# Altium PCB ESC.PcbDoc_Small.PcbDoc (part 2 of 2)
Units mil, origin at the board's own origin, x right, y up, seen from the top; angles counter-clockwise.
Board outline 6500 x 4500 mil, 2 copper layers (Top Layer, Bottom Layer), stack 33.512 mil thick; 85 components, 105 nets, 407 pads, 133 vias.
Unrouted connection lines stored in the file: 8.
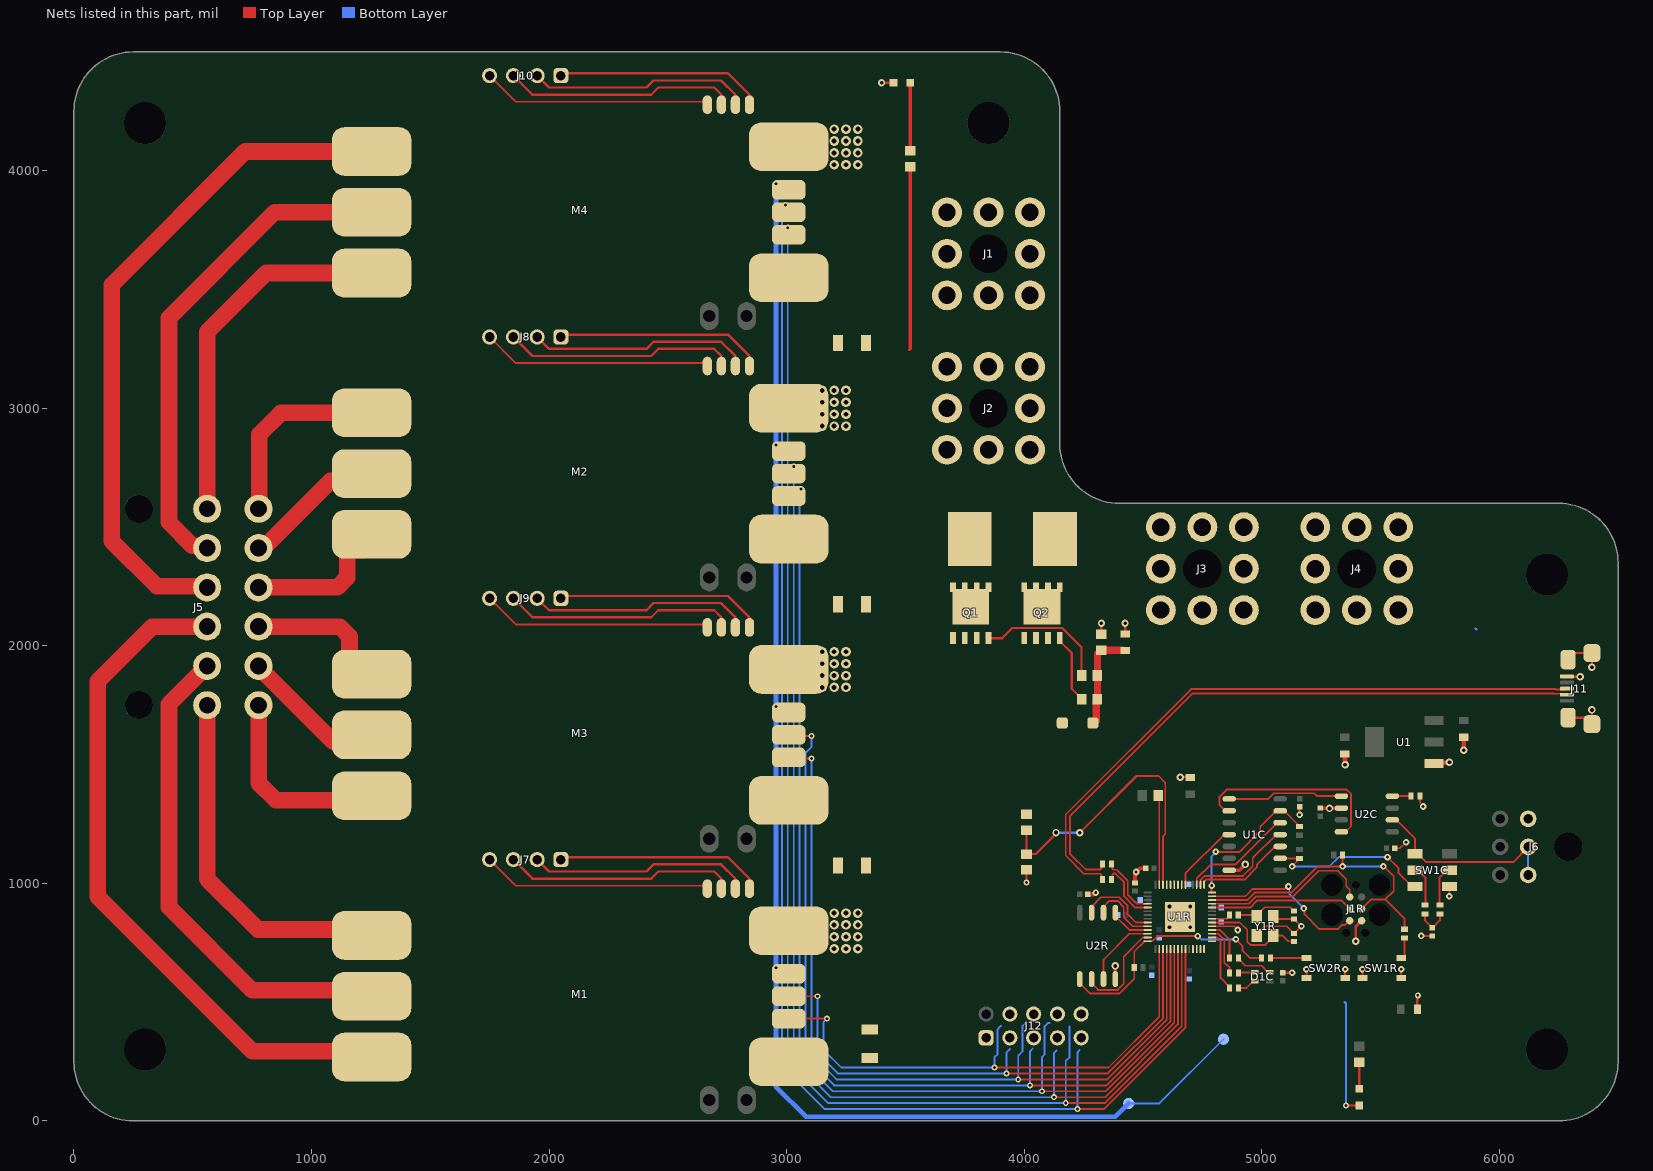
[diagram p2: the nets of this part, all layers, seen from the top]

## Via types
v1: diameter 40, hole 20, Top Layer to Bottom Layer, tented both sides, 48 vias
v2: diameter 27.56, hole 11.81, Top Layer to Bottom Layer, 25 vias
v3: diameter 25, hole 12, Top Layer to Bottom Layer, tented both sides, 23 vias
v4: diameter 31.5, hole 15.75, Top Layer to Bottom Layer, 16 vias
v5: diameter 27.56, hole 11.81, Top Layer to Bottom Layer, tented top, 9 vias
v6: diameter 45.28, hole 27.56, Top Layer to Bottom Layer, 6 vias
v7: diameter 31.5, hole 15.75, Top Layer to Bottom Layer, tented top, 3 vias
v8: diameter 30, hole 15, Top Layer to Bottom Layer, tented both sides, 3 vias

## Nets (pads, with @x,y where several pads share a name; then routed paths per layer and width w, separated by ;. In a path a pad name is that pad's centre, name@x,y a point inside that pad or via, vN(x,y) a via of type N, cw(c..) or ccw(c..) an arc to the next point about the centre after c; other vN are vias at no path point) (continued)
CANL: J6.2 J6.3 SW1C.1 U2C.6 | length 843.1
  Top Layer w8: U2C.6@5533.27,1267.09 U2C.6@5550,1267.09 5566.73,1267.09 5645.47,1188.35 SW1C.1@5645.47,1124.77 5657.28,1124.77 5692.05,1090 6057.93,1090 J6.2@6121.36,1153.44
  Bottom Layer w8: J6.3@6121.36,1035.33 J6.2@6121.36,1153.44
CANRX_RP2CAN: U1C.2 U2C.4 | length 845.6
  Top Layer w7.87: U1C.2@4862.99,1305.48 4846.26,1305.48 4822.64,1329.1 4822.64,1365.26 4852.42,1395.04 5357.62,1395.04 5375.79,1376.88 5375.79,1240.71 5352.17,1217.09 U2C.4@5335.43,1217.09
CANTX_RP2CAN: U1C.1 U2C.1 | length 487.4
  Top Layer w7.87: U1C.1@4862.99,1355.48 5027.42,1355.48 5051.24,1379.3 5220.89,1379.3 5233.09,1367.09 U2C.1@5335.43,1367.09
DBG_TX_RP2040: J1R.5 U1R.27 | length 714.8
  Top Layer w7.87: U1R.27@4790.65,945.63 4931.64,945.63 4963.14,977.13 5097.55,977.13 5107.4,986.97 v2(5112.01,986.97) ; v2(5176.97,894.82) 5180.11,891.68 5180.11,869.65 5242.33,807.44 5320.51,807.44 5337.38,824.32 5350.41,824.32 5368.98,842.88 J1R.5@5370.47,842.88
  Bottom Layer w7.87: v2(5112.01,986.97) 5115.74,983.24 5115.74,956.06 v2(5176.97,894.82)
dGND: C1C.2 C1R.2 C2.2 C2C.1 C2R.2 C3.2 C3C.2 C3R.2 C4C.2 C4R.2 C5C.2 C5R.2 C6.2 C6R.2 C7.2 C7R.2 C8R.2 C9R.2 C10R.2 C11R.2 C12R.2 C13R.2 D3.2 J1R.6 J6.1 J11.5 J11.6 J11.7 J11.8 J11.9 J12.1 M1.10 M2.10 M3.10 M4.10 R4.2 R6C.2 SW1C.6 SW1R.B1 SW1R.B2 SW2R.B1 SW2R.B2 TP1.TP TP2.TP U1.1 U1C.7 U1R.19 U1R.57 U2C.2 U2R.4 Y1R.2 Y1R.4 | length 8449.7
  Top Layer w7.87: v4(4698.62,815.71) U1R.57@4702.56,819.65 ; U1R.19@4790.65,819.65 4883.66,819.65 v5(4899.41,803.9) ; SW2R.B1@5187.8,601.15 v2(5187.8,638.55) ; SW2R.B2@5351.18,601.15 v2(5351.18,638.55) ; SW1R.B1@5423.9,604.89 5424.02,605 v2(5424.02,638.55) ; C3C.2@5559.41,1147.21 5559.87,1147.67 5581.76,1147.67 v2(5607.45,1173.36) ; SW1R.B2@5587.4,601.15 v2(5587.4,638.55) ; R6C.2@5666.14,1367.09 5666.14,1340.52 5678.94,1327.72 v2(5678.94,1323.59) ; v2(5671.06,778.9) C2C.1@5718.31,778.9 ; v5(5789.17,945.63) 5789.17,985 SW1C.6@5791.14,986.97
  Top Layer w8: Y1R.4@4979.02,780.28 4979.02,786.19 5012.54,819.71 5104.66,819.71 5134.84,789.53 C1R.2@5135.63,789.53 5136.42,789.53 v2@5166.54,819.65 ; Y1R.2@5049.02,860.28 5059.53,849.77 C2R.2@5135.63,849.77 5136.42,849.77 v2@5166.54,819.65 ; v2(5159.25,1289.33) C1C.2@5159.25,1322.21 C1C.2@5159.25,1324.33 ; v2(5167.13,819.65) v2@5166.54,819.65 ; SW1R.B1@5423.9,604.89 SW1R.B1@5426.57,602.21
  Top Layer w9.84: C5C.2@5088.39,624.18 v2(5127.76,624.18) ; v3(5355,65) D3.2@5410,65
  Top Layer w10: v3(4010,1004) R4.2@4010,1056.5 ; v4@4656,1448 4697,1448 C3.2@4700,1445 ; C2.2@5655,470 5655,527 v3(5657,529) ; J11.5@6284.69,1871.18 6285.28,1870.59 6339.41,1870.59 v4(6340,1870) ; J11.6@6289.61,1697.95 6357.53,1697.95 6385.09,1670.39 J11.9@6390,1670.39 v4(6390,1730) ; J11.7@6289.61,1942.05 6289.61,1943.93 6315.28,1969.61 J11.8@6390,1969.61 v4(6390,1910)
  Top Layer w11.81: v4(5395.56,756.34) 5395.56,817.96 J1R.6@5420.47,842.88
  Top Layer w15.75: C3R.2@4268.11,953.51 4293.11,953.51 v2(4300.98,961.38) ; U2R.4@4383.86,597.15 v7(4383.86,652.43) ; C4R.2@4466.34,1002.13 4466.34,1039.88 4471.26,1044.8 v2(4471.26,1048) 4487.23,1063.97 4511.98,1063.97 C10R.2@4512.2,1063.74 ; U1C.7@4862.99,1055.48 4905.83,1055.48 v4(4930.38,1080.02) ; C4C.2@5245.87,1317.09 5246.56,1316.4 5284.55,1316.4 v4(5285.24,1315.71) 5285.93,1316.4 5334.74,1316.4 U2C.2@5335.43,1317.09
  Top Layer w20: v4@5350,1500 C7.2@5350,1545 ; U1.1@5725,1504.45 5728.35,1507.8 5787.8,1507.8 v4(5790,1510) ; v4(5850,1560) C6.2@5850,1615
  Bottom Layer w7.87: TP1.TP@4440,74 4569,74 TP2.TP@4839,344
  Bottom Layer w9.84: 5350,500 5355,495 v3(5355,65)
  Bottom Layer w20: v3(2955,3945) v3(2955,2845) v3(2955,1745) v3(2955,645) 2955,145 3082.13,17.87 4383.87,17.87 TP1.TP@4440,74
  other v4: 4612.01,815.71 4612.01,902.33 4698.62,902.33 4656.69,1447.31 5350.69,1499.31
ESC1_P1: J5.3 M1.3 | length 2884.5
  Top Layer w70: J5.3@561,2080.71 330.71,2080.71 100,1850 100,944.49 750.39,294.09 M1.3@1253.03,294.09
ESC1_P2: J5.2 M1.4 | length 2101.5
  Top Layer w9.84: J5.2@545.65,1900 J5.2@561,1915.35
  Top Layer w70: J5.2@561,1915.35 400,1754.35 400,900.39 750.39,550 M1.4@1253.03,550
ESC1_P3: J5.1 M1.5 | length 1511.3
  Top Layer w70: J5.1@561,1750 561,1019 774.09,805.91 M1.5@1253.03,805.91
ESC1_PWM: J12.6 M1.9 U1R.3 | length 2347.6
  Top Layer w7.87: M1.9@3008.94,525 v3(3129.31,525) ; v3(3925,200) 4352.27,200 4584.45,432.18 U1R.3@4584.45,723.69
  Bottom Layer w7.87: v3(3129.31,525) 3130,524.31 3130,285 3215,200 v3(3925,200) 3925,287 3941,303
ESC1_TELEM: J12.4 M1.8 U1R.2 | length 2302.2
  Top Layer w7.87: M1.8@3008.94,430.51 v3(3170,430.51) ; v3(3875,225) 4355,225 4568.7,438.7 U1R.2@4568.7,723.69
  Bottom Layer w7.87: v3(3170,430.51) 3155,415.51 3155,300 3230,225 v3(3875,225) 3875,268 3888,281 3888,386 3902,400
ESC2_P1: J5.10 M2.3 | length 623
  Top Layer w70: J5.10@777.53,2246.06 1108.99,2246.06 1150,2287.07 1150,2402.96 1217.81,2402.96 M2.3@1253.03,2438.19
ESC2_P2: J5.11 M2.4 | length 553.6
  Top Layer w70: J5.11@777.53,2411.42 J5.11@790.55,2411.42 ; J5.11@797.63,2411.42 1080.3,2694.09 ; M2.4@1109.15,2694.09 M2.4@1250,2694.09
ESC2_P3: J5.12 M2.5 | length 824.9
  Top Layer w70: J5.12@777.53,2576.77 780,2579.24 780,2890 870.91,2980.91 M2.5@1253.03,2980.91
ESC2_PWM: J12.10 M2.9 U1R.7 | length 4826.6
  Top Layer w7.87: v3(4125,100) 4341.36,100 4647.44,406.09 U1R.7@4647.44,723.69
  Bottom Layer w7.87: v3(3030,2755) 3030,255 3185,100 v3(4125,100) 4125,285 4136,296
ESC2_TELEM: J12.8 M2.8 U1R.6 | length 4752.9
  Top Layer w7.87: v3(4075,125) 4344.08,125 4631.69,412.61 U1R.6@4631.69,723.69
  Bottom Layer w7.87: v3(3060,2660) 3060,2620 3055,2615 3055,265 3195,125 v3@4062.6,125 ; v3(4075,125) 4075,269 4085,279 4085,397 4100,412 4106,412
ESC3_P1: J5.7 M3.3 | length 824.2
  Top Layer w9.84: M3.3@1227.95,1350 M3.3@1236.61,1341.34
  Top Layer w70: J5.7@777.54,1753.94 777.54,1422.46 850,1350 M3.3@1227.95,1350
ESC3_P2: J5.8 M3.4 | length 619
  Top Layer w9.84: J5.8@777.53,1911.04 J5.8@777.53,1915.35 J5.8@792.89,1900 ; M3.4@1091.33,1597.24 1236.61,1597.24 M3.4@1233.86,1600
  Top Layer w70: J5.8@777.53,1911.04 M3.4@1091.33,1597.24
ESC3_P3: J5.9 M3.5 | length 640.3
  Top Layer w70: J5.9@777.53,2080.71 1118.99,2080.71 1160,2039.7 1160,1919.28 1226.13,1853.15 M3.5@1253.03,1853.15
ESC3_PWM: J12.7 M3.9 U1R.5 | length 3619.7
  Top Layer w7.87: M3.9@3008.94,1625 3013.94,1620 v3(3105,1620) ; v3(4025,150) 4346.81,150 4615.94,419.13 U1R.5@4615.94,723.69
  Bottom Layer w7.87: v3(3105,1620) 3105,1575 3080,1550 3080,270 3200,150 v3(4025,150) 4025,294 4036,305
ESC3_TELEM: J12.9 M3.8 U1R.4 | length 3533.7
  Top Layer w7.87: M3.8@3008.94,1530.51 3014.45,1525 v3(3105,1525) ; v3(3975,175) 4349.54,175 4600.2,425.65 U1R.4@4600.2,723.69
  Bottom Layer w7.87: v3(3105,1525) 3105,280 3210,175 v3(3975,175) 3975,275 3993,293 3993,399 4006,412
ESC4_P1: J5.6 M4.3 | length 1539
  Top Layer w70: J5.6@561,2576.77 561,3321 809.09,3569.09 M4.3@1253.03,3569.09
ESC4_P2: J5.5 M4.4 | length 2103.3
  Top Layer w70: J5.5@561,2411.42 551.79,2420.62 499.38,2420.62 400,2520 400,3380 845,3825 M4.4@1253.03,3825
ESC4_P3: J5.4 M4.5 | length 2886.7
  Top Layer w9.84: J5.4@556.13,2250.93 J5.4@561,2246.06
  Top Layer w70: J5.4@556.13,2250.93 349.07,2250.93 160,2440 160,3520 720.91,4080.91 M4.5@1253.03,4080.91
ESC4_PWM: J12.3 M4.9 U1R.9 | length 6130.2
  Top Layer w7.87: v3(4225,50) 4335.9,50 4678.94,393.04 U1R.9@4678.94,723.69
  Bottom Layer w7.87: v3(2995,3855) 2995,3850.62 2980,3835.62 2980,230 3160,50 v3(4225,50) 4225,290 4234,299
ESC4_TELEM: J12.5 M4.8 U1R.8 | length 6039.3
  Top Layer w7.87: v3(4175,75) 4338.63,75 4663.19,399.56 U1R.8@4663.19,723.69
  Bottom Layer w7.87: v3(3005,3760) 3000,3760 3005,3755 3005,245 3175,75 v3(4175,75) 4175,253 4191,269 4191,397 4190,398
GND: C1.1 D1.2 J3.1 J4.1 M1.2 M2.2 M3.2 M4.2 R2.2 | length 145
  Top Layer w9.84: v8(3400,4370) D1.2@3450,4370 ; R2.2@4325,2048.5 v8(4325,2095) ; C1.1@4425,2050 v8(4425,2095)
  Bottom Layer w9.84: 5900,2072 5902.49,2069.51
  other v1: 3200,725 3250,725 3300,725 3200,775 3250,775 3300,775 3200,825 3250,825 3300,825 3200,875 3250,875 3300,875 3150,1825 3200,1825 3250,1825 3150,1875 3200,1875 3250,1875 3150,1925 3200,1925 3250,1925 3150,1975 3200,1975 3250,1975 3150,2925 3200,2925 3250,2925 3150,2975 3200,2975 3250,2975 3150,3025 3200,3025 3250,3025 3150,3075 3200,3075 3250,3075 3200,4025 3250,4025 3300,4025 3200,4075 3250,4075 3300,4075 3200,4125 3250,4125 3300,4125 3200,4175 3250,4175 3300,4175
INT_RP2CAN: U1C.4 U1R.34 | length 297.2
  Top Layer w7.87: U1R.34@4678.94,996.82 4678.94,1042.42 4842,1205.48 U1C.4@4862.99,1205.48
LEDB_RP2CAN: R8C.1 U1R.18 | length 168.1
  Top Layer w7.87: U1R.18@4790.65,803.9 4823.51,803.9 4864.96,762.45 R8C.1@4864.96,685.79
LEDG_RP2CAN: R7C.1 U1R.17 | length 213.3
  Top Layer w7.87: U1R.17@4790.65,788.15 4816.98,788.15 4842.32,762.81 4842.32,666.14 4852.18,656.28 4855.1,656.28 4864.96,646.42 R7C.1@4864.96,622.8
LEDR_RP2CAN: R5C.1 U1R.16 | length 255
  Top Layer w7.87: U1R.16@4790.65,772.41 4810.46,772.41 4826.57,756.29 4826.57,602.13 4864.96,563.74 R5C.1@4864.96,559.81
MISO_RP2CAN: U1C.12 U1R.31 | length 475
  Top Layer w7.87: U1R.31@4726.18,994.35 4726.18,1020.69 4784.59,1079.1 4888.71,1079.1 5065.09,1255.48 U1C.12@5077.56,1255.48
MOSI_RP2CAN: U1C.11 U1R.30 | length 454.6
  Top Layer w7.87: U1R.30@4741.93,994.35 4741.93,1014.16 4759.62,1031.85 4921.18,1031.85 4962.4,1073.07 4962.4,1107.05 5060.83,1205.48 U1C.11@5077.56,1205.48
nCS_RP2CAN: R4C.2 U1C.13 U1R.28 | length 646.2
  Top Layer w7.87: v5(4789.17,990.52) 4789.17,961.38 U1R.28@4790.65,961.38 ; v5(4806.12,1133.41) 4807.68,1131.85 4904.53,1131.85 4993.64,1220.96 4993.64,1238.29 5060.83,1305.48 U1C.13@5077.56,1305.48 5094.29,1305.48 5148.43,1251.34 5148.43,1246.82 5155.31,1239.93 R4C.2@5159.25,1239.93
  Bottom Layer w7.87: v5(4789.17,990.52) 4789.17,1114.17 4806.12,1131.12 v5(4806.12,1133.41)
NetC1_2: C1.2 D2.1 R2.1 R5.2 R6.1 | length 404
  Top Layer w30: D2.1@4289.37,1675 4294.48,1675 4303.5,1684.02 4303.5,1770 R6.1@4308.5,1775 R5.2@4308.5,1875 R2.1@4308.5,1967.5 ; R2.1@4325,1981.5 4418.5,1981.5 4420,1980 C1.2@4425,1980
NetC2C_2: C2C.2 R2C.2 R3C.2 | length 144.3
  Top Layer w7.87: R2C.2@5686.81,871.82 5686.81,843.86 5717.52,813.15 C2C.2@5718.31,813.15 5719.09,813.15 5749.8,843.86 R3C.2@5749.8,871.82
NetC2R_1: C2R.1 R1R.2 Y1R.3 | length 263.4
  Top Layer w8: R1R.2@4901.3,866.89 4972.4,866.89 Y1R.3@4979.02,860.28 4979.02,866.19 5012.54,899.71 5119.15,899.71 5134.84,884.02 C2R.1@5135.63,884.02
NetD1_1: D1.1 R1.2 | length 286.5
  Top Layer w15: R1.2@3520,4083.5 D1.1@3520,4370
NetD1C_1: D1C.1 R5C.2 | length 80.1
  Top Layer w7.87: R5C.2@4902.36,559.81 4935.83,559.81 4965.35,589.33 D1C.1@4970.28,589.33
NetD1C_2: D1C.2 R7C.2 | length 68.7
  Top Layer w7.87: R7C.2@4902.36,622.8 4904.33,624.77 D1C.2@4970.28,624.77
NetD1C_3: D1C.3 R8C.2 | length 158.5
  Top Layer w7.87: R8C.2@4902.36,685.79 4902.36,681.85 4930.91,653.31 4999.8,653.31 5028.35,624.77 D1C.3@5033.27,624.77
NetD3_1: D3.1 R7.1 | length 111.5
  Top Layer w10: D3.1@5410,135 R7.1@5410,246.5
NetF1_2: F1.2 M1.1
NetF2_2: F2.2 M2.1
NetF3_2: F3.2 M3.1
NetF4_2: F4.2 M4.1
NetF5_2: F5.2 Q1.D Q2.D
NetJ7_1: J7.1 M1.11 | length 854.8
  Top Layer w9.84: J7.1@2050,1100 2060,1110 2753.27,1110 2843.58,1019.68 M1.11@2843.58,1000
NetJ7_2: J7.2 M1.12 | length 912.3
  Top Layer w9.84: J7.2@1950,1100 2000,1050 2410,1050 2440,1080 2724.21,1080 2784.53,1019.68 M1.12@2784.53,1000
NetJ7_3: J7.3 M1.13 | length 953.3
  Top Layer w9.84: J7.3@1850,1100 1930,1020 2430,1020 2460,1050 2695.16,1050 2725.47,1019.68 M1.13@2725.47,1000
NetJ7_4: J7.4 M1.14 | length 966.1
  Top Layer w7.87: J7.4@1750,1100 1860,990 2656.42,990 M1.14@2666.42,1000
NetJ8_1: J8.1 M2.11 | length 854.8
  Top Layer w9.84: J8.1@2050,3300 2060,3310 2753.27,3310 2843.58,3219.68 M2.11@2843.58,3200
NetJ8_2: J8.2 M2.12 | length 912.3
  Top Layer w9.84: J8.2@1950,3300 2000,3250 2410,3250 2440,3280 2724.21,3280 2784.53,3219.68 M2.12@2784.53,3200
NetJ8_3: J8.3 M2.13 | length 953.3
  Top Layer w9.84: J8.3@1850,3300 1930,3220 2430,3220 2460,3250 2695.16,3250 2725.47,3219.68 M2.13@2725.47,3200
NetJ8_4: J8.4 M2.14 | length 966.1
  Top Layer w7.87: J8.4@1750,3300 1860,3190 2656.42,3190 M2.14@2666.42,3200
NetJ9_1: J9.1 M3.11 | length 854.8
  Top Layer w9.84: J9.1@2050,2200 2060,2210 2753.27,2210 2843.58,2119.68 M3.11@2843.58,2100
NetJ9_2: J9.2 M3.12 | length 912.3
  Top Layer w9.84: J9.2@1950,2200 2000,2150 2410,2150 2440,2180 2724.21,2180 2784.53,2119.68 M3.12@2784.53,2100
NetJ9_3: J9.3 M3.13 | length 953.3
  Top Layer w9.84: J9.3@1850,2200 1930,2120 2430,2120 2460,2150 2695.16,2150 2725.47,2119.68 M3.13@2725.47,2100
NetJ9_4: J9.4 M3.14 | length 966.1
  Top Layer w7.87: J9.4@1750,2200 1860,2090 2656.42,2090 M3.14@2666.42,2100
NetJ10_1: J10.1 M4.11 | length 854.8
  Top Layer w9.84: J10.1@2050,4400 2060,4410 2753.27,4410 2843.58,4319.69 M4.11@2843.58,4300
NetJ10_2: J10.2 M4.12 | length 912.3
  Top Layer w9.84: J10.2@1950,4400 2000,4350 2410,4350 2440,4380 2724.21,4380 2784.53,4319.69 M4.12@2784.53,4300
NetJ10_3: J10.3 M4.13 | length 953.3
  Top Layer w9.84: J10.3@1850,4400 1930,4320 2430,4320 2460,4350 2695.16,4350 2725.47,4319.69 M4.13@2725.47,4300
NetJ10_4: J10.4 M4.14 | length 966.1
  Top Layer w7.87: J10.4@1750,4400 1860,4290 2656.42,4290 M4.14@2666.42,4300
NetQ1_4: Q1.4 R5.1 | length 561.6
  Top Layer w9.84: Q1.4@3850,2032.5 3907.5,2032.5 3950,2075 4160.37,2075 4241.5,1993.87 R5.1@4241.5,1875
NetQ2_4: Q2.4 R6.2 | length 295.4
  Top Layer w9.84: Q2.4@4150,2032.5 4150,2019.5 4200,1969.5 4200,1819 4241.5,1777.5 R6.2@4241.5,1775
NetR2C_1: R2C.1 SW1C.2 | length 172.3
  Top Layer w7.87: SW1C.2@5645.47,1055.87 5657.28,1055.87 5688.78,1024.37 5688.78,911.19 R2C.1@5686.81,909.22
NetR3C_1: R3C.1 SW1C.5 | length 172.3
  Top Layer w7.87: R3C.1@5749.8,909.22 5747.83,911.19 5747.83,1024.37 5779.33,1055.87 SW1C.5@5791.14,1055.87
NetR6C_1: R6C.1 U2C.8 | length 78.7
  Top Layer w7.87: U2C.8@5550,1367.09 R6C.1@5628.74,1367.09
NetR6R_1: R6R.1 SW1R.A2 | length 91.3
  Top Layer w7.87: SW1R.A2@5587.4,685.79 5591.34,685.79 5600.2,694.65 R6R.1@5600.2,769.45
NetR7R_1: R7R.1 SW2R.A1 | length 151.6
  Top Layer w7.87: R7R.1@5036.22,685.79 SW2R.A1@5187.8,685.79
NetSB1_1: SB1.1 U1R.41 | length 391.4
  Top Layer w7.87: SB1.1@4563.5,1370 4564.8,1371.3 SB1.1@4564.8,1385.2 ; U1R.41@4568.7,994.35 SB1.1@4568.7,1370
NetU1R_11: U1R.11
NetU1R_12: U1R.12
NetU1R_13: U1R.13
NetU1R_14: U1R.14
NetU1R_15: U1R.15
NetU1R_35: U1R.35
NetU1R_36: U1R.36
NetU1R_37: U1R.37
NetU1R_38: U1R.38
NetU1R_39: U1R.39
QSPI_SCLK_RP2040: U1R.52 U2R.6 | length 286.6
  Top Layer w7.87: U2R.6@4333.86,880.67 4333.86,902.33 4357.48,925.95 4393.64,925.95 4419.09,900.5 4419.09,857.84 4457.28,819.65 U1R.52@4519.98,819.65
QSPI_SD0_RP2040: U1R.53 U2R.5 | length 178.4
  Top Layer w7.87: U2R.5@4383.86,880.67 4383.86,862.76 4442.72,803.9 U1R.53@4519.98,803.9
QSPI_SD1_RP2040: U1R.55 U2R.2 | length 427.3
  Top Layer w7.87: U2R.2@4283.86,601.15 4283.86,579.49 4311.42,551.93 4324.02,551.93 4324.07,551.88 4393.64,551.88 4419.09,577.33 4419.09,691.33 4500.17,772.41 U1R.55@4519.98,772.41
QSPI_SD2_RP2040: U1R.54 U2R.3 | length 309.4
  Top Layer w7.87: U2R.3@4333.86,601.15 4333.86,679.3 4442.72,788.15 U1R.54@4519.98,788.15
QSPI_SD3_RP2040: U1R.51 U2R.7 | length 339.2
  Top Layer w7.87: U2R.7@4283.86,880.67 4283.86,902.33 4323.23,941.7 4400.17,941.7 4435.33,906.53 4435.33,870.57 4470.5,835.4 U1R.51@4519.98,835.4
QSPI_SS_RP2040: R5R.2 R7R.2 U1R.56 U2R.1 | length 1007.5
  Top Layer w7.87: U2R.1@4233.86,601.15 4233.86,579.49 4277.22,536.13 4400.17,536.13 4463.39,599.35 R5R.2@4463.39,646.42 4463.39,713.35 U1R.56@4506.69,756.66 ; U1R.56@4519.98,756.66 4539.79,756.66 4561.44,778.31 v5(4730.76,778.31) ; v5(4891.54,764.53) 4918.66,737.41 4918.66,718.99 4951.86,685.79 R7R.2@4998.82,685.79
  Bottom Layer w7.87: v5(4730.76,778.31) 4731.43,778.31 4745.21,764.53 v5(4891.54,764.53)
RUN_RP2040: J1R.4 R4R.2 R6R.2 U1R.26 | length 1275.3
  Top Layer w7.87: U1R.26@4790.65,929.89 4938.16,929.89 4969.66,961.38 5124.58,961.38 5234.81,1071.62 v2(5340.35,1071.62) R4R.2@5340.35,1118.86 ; J1R.4@5420.47,892.88 5460.04,932.44 5520.51,932.44 ; v2(5512.26,1071.62) 5513.58,1071.62 5555.91,1029.29 5555.91,967.84 5520.51,932.44 ; R6R.2@5600.2,806.85 5600.2,852.75 5520.51,932.44
  Bottom Layer w7.87: v2(5340.35,1071.62) v2(5512.26,1071.62)
SCK_RP2CAN: U1C.10 U1R.29 | length 400.1
  Top Layer w7.87: U1R.29@4757.68,994.35 4757.68,1007.64 4766.14,1016.11 4927.71,1016.11 4979.94,1068.34 4979.94,1078.1 5057.31,1155.48 U1C.10@5077.56,1155.48
SWCLK_RP2040: J1R.3 U1R.24 | length 606.9
  Top Layer w7.87: U1R.24@4790.65,898.39 4951.21,898.39 4981.14,928.32 5335.04,928.32 J1R.3@5370.47,892.88
SWDIO_RP2040: J1R.1 U1R.25 | length 718.6
  Top Layer w7.87: U1R.25@4790.65,914.14 4944.69,914.14 4974.61,944.06 5130.01,944.06 5239.26,1053.32 5320.51,1053.32 5355.91,1017.91 5355.91,987.98 5370.47,973.42 J1R.1@5370.47,942.88
TERM_DET_RP2CAN: R1C.2 SW1C.3 U1C.9 | length 723.9
  Top Layer w7.87: U1C.9@5077.56,1105.48 R1C.2@5155.31,1105.48 ; v5(5127.76,1071.62) 5148.43,1092.29 5148.43,1098.59 R1C.2@5155.31,1105.48 ; R1C.2@5159.25,1105.48 R1C.2@5155.31,1105.48 ; v2(5529.33,1110.99) 5575.4,1064.92 5575.4,1045.23 5633.66,986.97 SW1C.3@5645.47,986.97
  Bottom Layer w7.87: v5(5127.76,1071.62) 5285.24,1071.62 5324.61,1110.99 v2(5529.33,1110.99)
USB_N: J11.2 R3R.1 | length 2649.5
  Top Layer w7.87: R3R.1@4329.53,1082.51 4324.74,1077.73 4324.74,1063.05 4320.13,1058.44 4258.96,1058.44 4192.64,1124.76 4192.64,1282.64 4710,1800 6230.27,1800 6232.01,1798.27 6280.83,1798.27 J11.2@6284.69,1794.41
USB_P: J11.3 R2R.1 | length 2708.7
  Top Layer w7.87: R2R.1@4329.53,1016.5 4324.74,1021.28 4324.74,1035.96 4320.13,1040.57 4251.56,1040.57 4174.76,1117.36 4174.76,1290.04 4702.6,1817.87 6237.68,1817.87 6239.41,1816.14 6280.83,1816.14 J11.3@6284.69,1820
USB_RP2040_N: R3R.2 U1R.46 | length 267.4
  Top Layer w7.87: R3R.2@4366.93,1082.51 4370.65,1078.79 4370.65,1061.99 4375.26,1057.38 4390.61,1057.38 4436.25,1011.74 4436.25,952.46 4474.58,914.14 U1R.46@4519.98,914.14
USB_RP2040_P: R2R.2 U1R.47 | length 267.4
  Top Layer w7.87: R2R.2@4366.93,1016.5 4370.65,1020.22 4370.65,1037.02 4375.26,1041.63 4384.09,1041.63 4420.51,1005.22 4420.51,945.94 4468.06,898.39 U1R.47@4519.98,898.39
VCC: D2.2 F1.1 F2.1 F3.1 F4.1 Q1.1 Q1.2 Q1.3 Q2.1 Q2.2 Q2.3 R1.1 R3.1 | length 773.6
  Top Layer w9.84: 3515,3245 3520,3250
  Top Layer w15: 3520,3250 R1.1@3520,4016.5
VCC_MEAS: R3.2 R4.1 U1R.40 | length 1268.3
  Top Layer w7.87: 4529,1452 4566,1452 4593.74,1424.26 4593.74,1206.83 4584.45,1197.55 U1R.40@4584.45,994.35
  Top Layer w9.84: R3.2@4010,1223 R4.1@4010,1123.5 4048.5,1123.5 4134,1209 v4(4134,1214) ; v4(4234,1213) 4473,1452 4529,1452
  Bottom Layer w9.84: v4(4134,1214) 4134.5,1213.5 4233.5,1213.5 v4(4234,1213)
VIN: F5.1 J1.1 J2.1
XIN_RP2040: C1R.1 U1R.20 Y1R.1 | length 443.1
  Top Layer w7.87: U1R.20@4790.65,835.4 4907.28,835.4 4938.78,803.9 4938.78,754.6 4952.47,740.91 5015.55,740.91 5049.02,774.37 Y1R.1@5049.02,780.28 5088.29,780.28 5112.01,756.56 5134.35,756.56 C1R.1@5135.63,755.28
XOUT_RP2040: R1R.1 U1R.21 | length 82.1
  Top Layer w7.87: U1R.21@4790.65,851.15 4852.09,851.15 4863.9,862.96 R1R.1@4863.9,866.89
pads on no net: J1.8 J1R.A J1R.B J1R.C J1R.D J1R.E J1R.F J1R.G J2.8 J3.8 J4.8 J5. J6.7 J11.1 J11.4 M1.6 M1.7 M2.6 M2.7 M3.6 M3.7 M4.6 M4.7 SW1R.A1 SW2R.A2 U1C.3 U1C.5 U1C.8

## Polygon pours and split planes (outlines as drawn)
dGND on Bottom Layer "NONET_L-01_P-001" (solid, remove dead copper, pour order 45): 6491.97,1580 6030,1580 6030,1800 6260,2030 6500,2030
dGND on Bottom Layer "NONET_L-01_P-001" (solid, remove dead copper, pour order 44): 4829,1944 3783,898 3783,310 6500,310 6500,1944
GND on Bottom Layer "NONET_L-01_P-001" (solid, remove dead copper, pour order 27): 5940,2600 3747,2600 3440,2907 3440,645 4835,2040 5940,2040
GND on Bottom Layer "NONET_L-01_P-001" (solid, remove dead copper, pour order 21): 3120,1220 3120,650 3445,650 3575,780 3575,4490 3120,4490 3120,3860
3V3 on Top Layer "3V3_RP2040" (solid, pour order 42): 4175,1400 5882,1400 5882,455 4175,455
NetF5_2 on Top Layer "NONET_L-01_P-001" (solid, remove dead copper, pour order 15): 4025,2575 4225,2575 4225,2050 3675,2050 3675,2300 3885,2300 3925,2340 3925,2475
VIN on Top Layer "NONET_L-01_P-001" (solid, remove dead copper, pour order 39): 3600,2750 3600,2400 3675,2325 3900,2325 3900,2475 4141.97,2716.97 4141.97,2750
VCC on Top Layer "NONET_L-01_P-001" (solid, remove dead copper, pour order 16): 3700,2075 cw(c3700,2125) 3650,2125 3650,2325 3500,2475 3500,350 3725,575 3725,925 4175,1375 4175,2075
NetF1_2 on Top Layer "NONET_L-01_P-001" (solid, remove dead copper, pour order 38): 3400,325 3300,325 3275,350 2925,350 2925,150 3375,150 3400,175
VCC on Top Layer "NONET_L-01_P-001" (solid, remove dead copper, pour order 37): 3575,425 3500,350 3300,350 3300,3350 3575,3350
NetF3_2 on Top Layer "NONET_L-01_P-001" (solid, remove dead copper, pour order 36): 3275,1450 2925,1450 2925,1125 3050,1000 3275,1000
NetF2_2 on Top Layer "NONET_L-01_P-001" (solid, remove dead copper, pour order 35): 3275,2550 2925,2550 2925,2225 3050,2100 3275,2100
NetF4_2 on Top Layer "NONET_L-01_P-001" (solid, remove dead copper, pour order 34): 3275,3650 2925,3650 2925,3325 3050,3200 3275,3200
GND on Top Layer "NONET_L-01_P-001" (solid, remove dead copper, pour order 6): 3150,700 3350,700 3350,900 3150,900
GND on Top Layer "NONET_L-01_P-001" (solid, remove dead copper, pour order 33): 3150,1800 3275,1800 3275,2000 3150,2000
GND on Top Layer "NONET_L-01_P-001" (solid, remove dead copper, pour order 32): 3150,2900 3275,2900 3275,3100 3150,3100
GND on Top Layer "NONET_L-01_P-001" (solid, remove dead copper, pour order 31): 3150,4000 3325,4000 3325,4200 3150,4200
VIN on Top Layer "VIN_L01_P030" (solid, pour order 30): 3600,3950 4150,3950 4150,2750 3600,2750

## Keep-outs
Keep-Out Layer:
  circle w10: c6200,300 r200
  circle w10: c6200,2300 r200
  circle w10: c3850,4200 r200
  circle w10: c300,300 r200
  circle w10: c300,4200 r200

## Other copper
Top Layer:
  pour cut-out: 4727.28,856.44 4777.28,806.44 4777.28,761.44 4687.28,761.44 4687.28,796.44
  pour cut-out: 4637.06,749.35 4637.28,749.57 4637.28,966.32 4584.67,966.32 4557.35,939 4557.35,866.38 4542.28,851.32 4542.28,751.32
  pour cut-out: 5067.28,1372.21 4857.28,1372.21 4852.28,1367.21 4852.28,1117.21 4992.28,1117.21 5082.28,1177.21
  pour cut-out: 4935.1,736.52 4935.13,736.49 4935.13,716.09 5135.71,717.21 5147.22,728.73 5147.22,733.37 5111.65,733.37 5087.6,757.43 5065.43,757.43 5050.41,742.42 5040.41,742.42
  pour cut-out: 5437.86,995.06 5433.8,984.31 5433.8,951.42 5439.86,945.37 5469.86,945.37 5469.86,970.37 5459.86,980.37

## Silkscreen, mask and mechanical layers (free items; w line width, h text height)
Top Overlay:
  drawing of 86 lines, arcs and shapes, not listed
  text "5V" at 1400,4298.95 h40 r90
  text "RX" at 1475,4298.95 h40 r90
  text "TX" at 1550,4298.95 h40 r90
  text "GND" at 1625,4298.95 h40 r90
  text "FLASH / CONN" at 1305,4274.65 h40 r90
  text "ESC 2/6" at 87.5,3580 h54 r270
  text "ESC 4/8" at 212.5,3580 h54 r270
  text "Thruster SubConn" at 406,3555 h84 r270
  text "5V" at 1400,3198.95 h40 r90
  text "RX" at 1475,3198.95 h40 r90
  text "TX" at 1550,3198.95 h40 r90
  text "GND" at 1625,3198.95 h40 r90
  text "ESC 1/5" at 87.5,3180 h54 r270
  text "ESC 3/7" at 212.5,3180 h54 r270
  text "FLASH / CONN" at 1305,3174.65 h40 r90
  text "5V" at 1400,2098.95 h40 r90
  text "RX" at 1475,2098.95 h40 r90
  text "TX" at 1550,2098.95 h40 r90
  text "GND" at 1625,2098.95 h40 r90
  text "FLASH / CONN" at 1305,2074.65 h40 r90
  text "Board ID Jumper" at 4625,1843.02 h54
  text "Thruster / Config" at 455,1632.39 h100 r270
  text "Unpopulated: ID 0 /  (Thrusters 1-4) / Populated: ID 1 /  (Thrusters 5-8)" at 4630,1506.82 h40
  text "TERM / ON" at 5640,1167.21 h40
  text "5V" at 1400,998.95 h40 r90
  text "RX" at 1475,998.95 h40 r90
  text "TX" at 1550,998.95 h40 r90
  text "GND" at 1625,998.95 h40 r90
  text "FLASH / CONN" at 1305,974.65 h40 r90
  text "3V3" at 3670,860 h40 r270
  text "1T" at 3770,860 h40 r270
  text "1P" at 3870,860 h40 r270
  text "2T" at 3970,860 h40 r270
  text "2P" at 4070,860 h40 r270
  text "5V" at 6210,825.01 h30 r90
  text "GND" at 6300,810.01 h30 r90
  text "GND" at 3670,730 h40 r270
  text "4P" at 3770,730 h40 r270
  text "4T" at 3870,730 h40 r270
  text "3P" at 3970,730 h40 r270
  text "3T" at 4070,730 h40 r270
  text "CANH" at 6209.99,655.02 h30 r90
  text "CANL" at 6300,655.02 h30 r90
  text "BOOT" at 5196.18,522.69 h40
  text "RESET" at 5412.41,522.69 h40
  text "CANH" at 6209.99,515.02 h30 r90
  text "CANL" at 6299.99,515.02 h30 r90
  text "The Underwater Robotics Team" at 3855.53,195 h45
  text "'.ProjectTitle'" at 3855,85 h45
  text "v'.BoardRevision'" at 4930,85.01 h45
Bottom Overlay:
  lines w10: 4740,130 4710,160 ; 4770,160 4710,160 ; 4710,160 4740,190 4710,160
  text "Reverse Polarity Fuse, if communication with ESCs fail, check this" at 5210,31.01 h30
Top Solder:
  circle w88.5: c6200,300 r44.25
  circle w88.5: c6200,2300 r44.25
  circle w88.5: c3850,4200 r44.25
  circle w88.5: c300,300 r44.25
  circle w88.5: c300,4200 r44.25
Bottom Solder:
  circle w88.5: c6200,300 r44.25
  circle w88.5: c6200,2300 r44.25
  circle w88.5: c3850,4200 r44.25
  circle w88.5: c300,300 r44.25
  circle w88.5: c300,4200 r44.25

## Text inside footprints (layer, text, board x,y; h text height)
J7: Top Overlay "1" at 2120,1080 h30 r180
J8: Top Overlay "1" at 2120,3280 h30 r180
J9: Top Overlay "1" at 2120,2180 h30 r180
J10: Top Overlay "1" at 2120,4380 h30 r180
J12: Top Overlay "1" at 3771,309 h30